# Altium PCB NFC Antenna PCB.PcbDoc
Units mil, origin at the board's own origin, x right, y up, seen from the top; angles counter-clockwise.
Board outline 2300 x 3995 mil, 2 copper layers (Top Layer, Bottom Layer); 48 components, 40 nets, 138 pads, 37 vias.
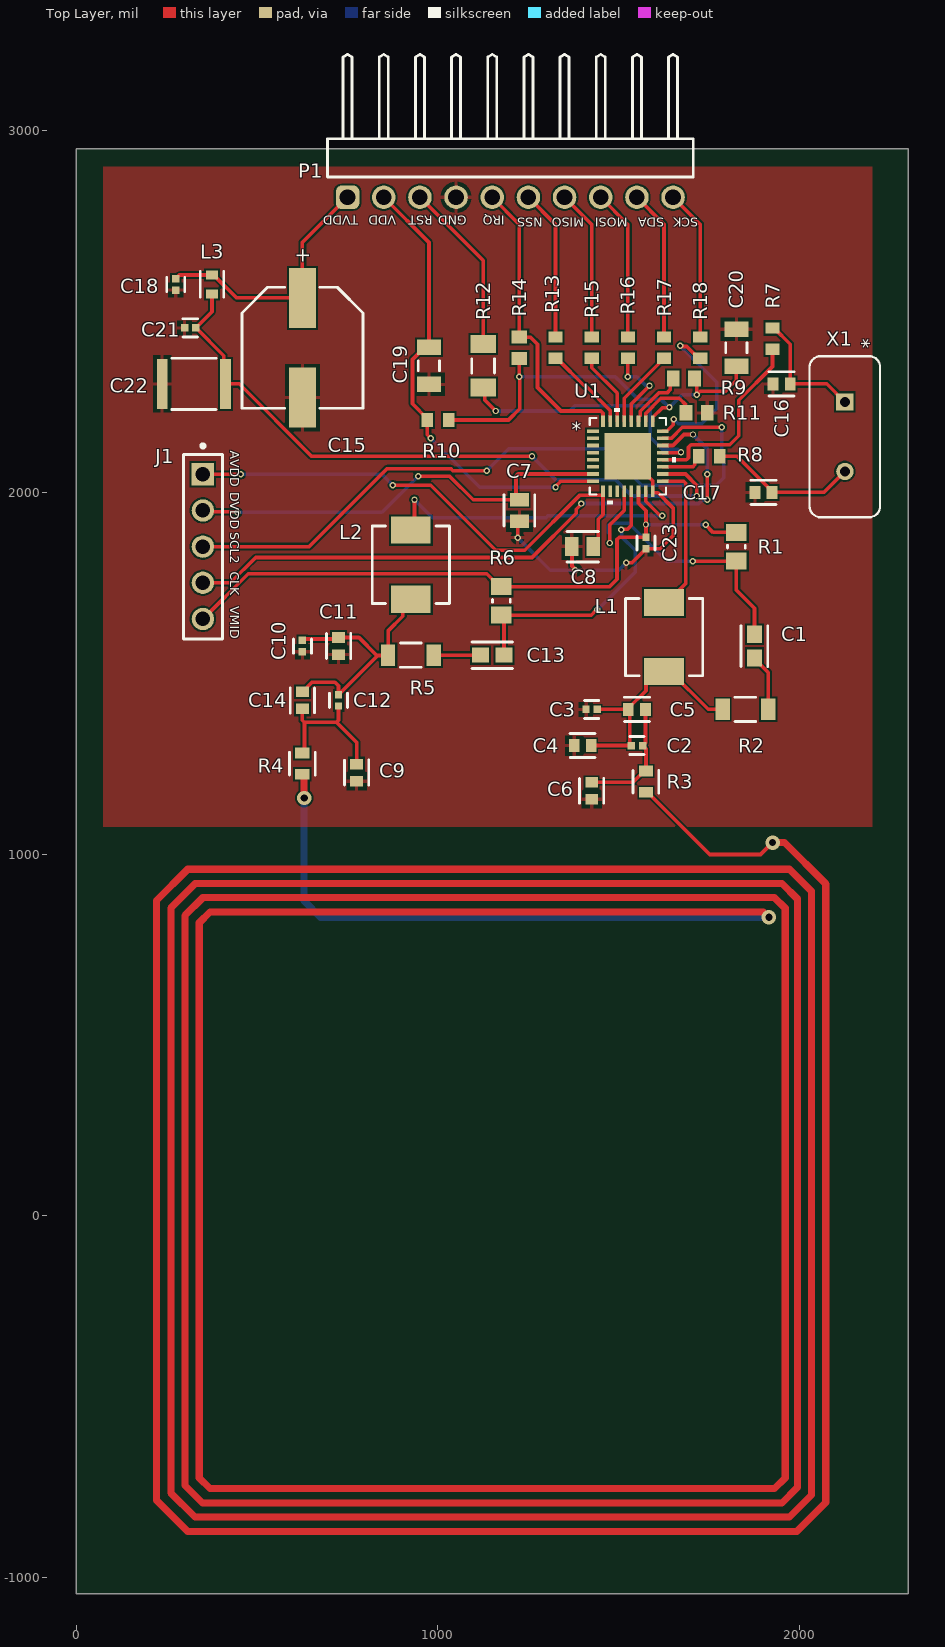
[diagram p0: Top Layer view]
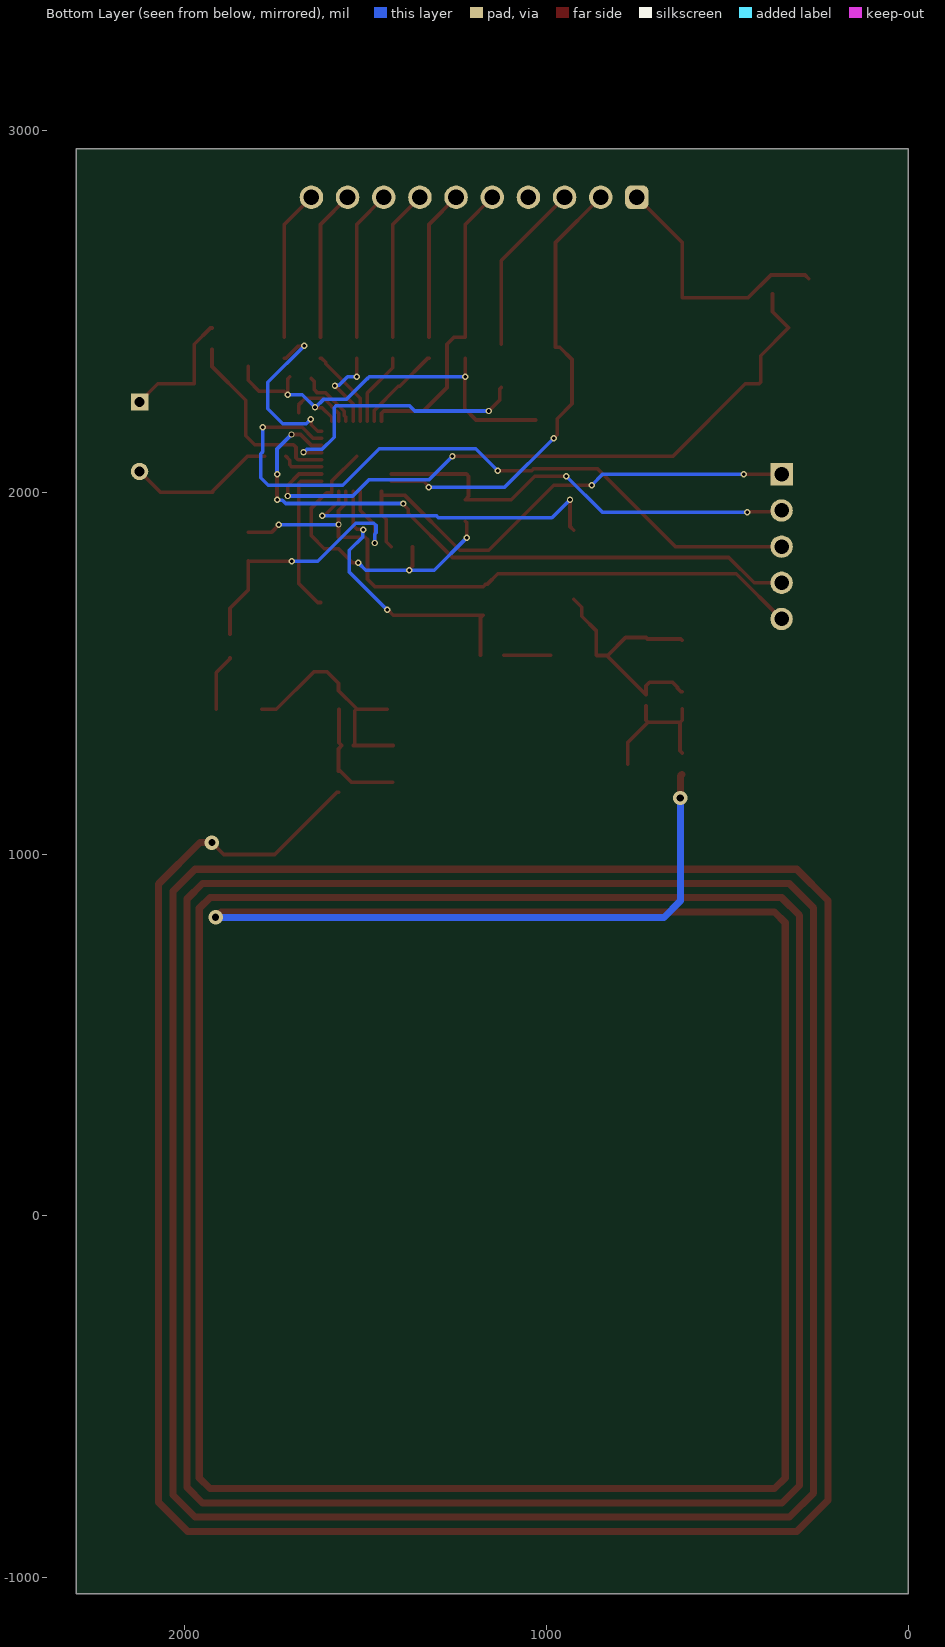
[diagram p1: Bottom Layer view, seen from below]
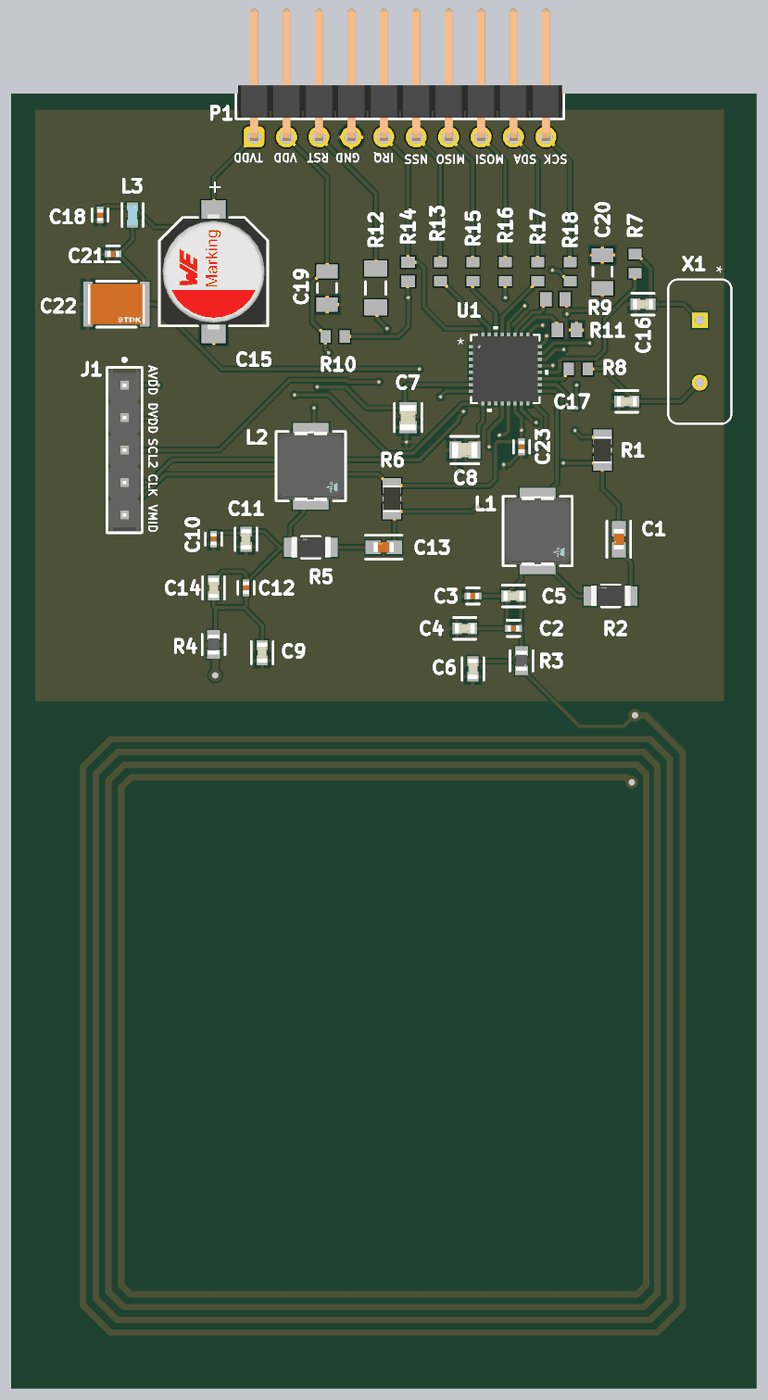
[diagram p2: 3D render of the assembled board from above, using the file's embedded part models]

## Layer stack, top to bottom
Top Solder: solder mask 0.4, Solder Resist, Dk 3.5
Top Layer: signal copper 1.4
Dielectric 1: dielectric 12.6, FR-4, Dk 4.8
Bottom Layer: signal copper 1.4
Bottom Solder: solder mask 0.4, Solder Resist, Dk 3.5

## Board outline
0,-1045 2300,-1045 2300,2950 0,2950

## Design rules (kind name [scope] priority, off if disabled: settings)
Clearance [All] p1: gap=5 ignorepadtopadclearanceinfootprint=FALSE except(0: SMDPad-Hole THPad-Hole Via-Hole Fill-Hole Poly-Hole Region-Hole Text-Hole)
HoleSize [All] p1: absolutevalues=TRUE maxlimit=248.03 minlimit=7.87 maxpercent=80.000 minpercent=20.000
HoleToHoleClearance [All] p1: gap=19.68 allowstackedmicrovias=TRUE
MinimumSolderMaskSliver [All] p1: minsoldermaskwidth=5
PolygonConnect [All] p1: connectstyle=Relief reliefconductorwidth=10 reliefentries=4 polygonreliefangle="90 Angle" airgapwidth=10
RoutingVias [All] p1: holewidth=9.84 width=17.72 viastyle="Through Hole" minholewidth=9.84 minwidth=17.72 maxholewidth=28 maxwidth=50
SilkToSilkClearance [All] p1: silktosilkclearance=5
SilkToSolderMaskClearance [IsPad] p1: minsilkscreentomaskgap=5 clearancetoexposedcopper=TRUE
SolderMaskExpansion [All] p1: expansion=4 istentingtop=FALSE
Width [All] p1: maxlimit=20 minlimit=5 preferedwidth=10 minimp=50.000000 maximp=50.000000 favimp=50.000000
25 further rules are at their usual default settings.

## Components (designator, comment, footprint, x,y, rotation, side; value= is the part's Value field where it differs from the comment)
C1 "06035C102KAT2A" FP-0603-L_1_6_0_15-W_0_81-IPC_A 1875,1575 r270 top
C2 "C0402C200J5GACTU" FP-C0402-BB-MFG 1550,1300 r0 top value="20 pF"
C3 "C0402C680J5GACTU" FP-C0402-BB-MFG 1425,1400 r180 top value="68 pF"
C4 "C0603C560J5GACTU" FP-C0603C-CF-MFG 1400,1300 r180 top value="56 pF"
C5 "C0603C510J5GACTU" FP-C0603C-CF-MFG 1550,1400 r0 top value="51 pF"
C6 "C0603C300J5GACTU" FP-C0603C-CF-MFG 1425,1175 r270 top value="30 pF"
C7 "C0805C474K5RACTU" FP-C0805C-DN-MFG 1225,1950 r270 top value="0.47 μF"
C8 "C0805C474K5RACTU" FP-C0805C-DN-MFG 1400,1850 r180 top value="0.47 μF"
C9 "C0603C300J5GACTU" FP-C0603C-CF-MFG 775,1225 r90 top value="30 pF"
C10 "C0402C680J5GACTU" FP-C0402-BB-MFG 625,1575 r90 top value="68 pF"
C11 "C0603C560J5GACTU" FP-C0603C-CF-MFG 725,1575 r90 top value="56 pF"
C12 "C0402C200J5GACTU" FP-C0402-BB-MFG 725,1425 r270 top value="20 pF"
C13 "06035C102KAT2A" FP-0603-L_1_6_0_15-W_0_81-IPC_A 1150,1550 r180 top
C14 "C0603C510J5GACTU" FP-C0603C-CF-MFG 625,1425 r270 top value="51 pF"
C15 "865060653010" WCAP-ASLL_D8H10.5 625,2400 r90 top
C16 "C0603C120J5GACTU" FP-C0603C-CF-MFG 1950,2300 r180 top value="12 pF"
C17 "C0603C120J5GACTU" FP-C0603C-CF-MFG 1900,2000 r180 top value="12 pF"
C18 "C0402C104K8PACTU" FP-C0402-BB-MFG 275,2575 r90 top value="0.10 μF"
C19 "C1206C105K5RACTU" CAPC3216X110X50LL20T25 975,2350 r90 top
C20 "C1206C105K5RACTU" CAPC3216X110X50LL20T25 1825,2400 r270 top
C21 "C0402C104K8PACTU" FP-C0402-BB-MFG 315,2455 r0 top value="0.10 μF"
C22 "C4532X7R1H685K250KB" FP-C4532-250-0_4-IPC_C 325,2300 r0 top
C23 "C0402C104K8PACTU" FP-C0402-BB-MFG 1575,1860 r270 top value="0.10 μF"
J1 "22-28-4050" FP-22-28-4050-MFG 350,1850 r270 top
L1 "IHLP2020CZERR47M01" FP-IHLP-2020CZ-FP_1_905x2-MFG 1625,1600 r270 top
L2 "IHLP2020CZERR47M01" FP-IHLP-2020CZ-FP_1_905x2-MFG 925,1800 r270 top
L3 "LQW18AN22NG00D" FP-LQW18AN_00-MFG 375,2575 r90 top
P1 "61301011021" 61301011021 1200,2925 r180 top
R1 "RC0805FR-071KL" RESC2013X60X35ML10T20 1825,1850 r90 top
R2 "RT1206BRD0712KL" FP-RT1206-MFG 1850,1400 r180 top value=12KΩ
R3 "CRCW060315R0FKEA" FP-CRCW0603-e3-MFG 1575,1200 r270 top
R4 "CRCW060315R0FKEA" FP-CRCW0603-e3-MFG 625,1250 r270 top
R5 "RT1206BRD0712KL" FP-RT1206-MFG 925,1550 r180 top value=12KΩ
R6 "RC0805FR-071KL" RESC2013X60X35ML10T20 1175,1700 r90 top
R7 "RC0603JR-070RL" RESC1608X55X25ML10T15 1925,2425 r90 top
R8 "RC0603JR-070RL" RESC1608X55X25ML10T15 1750,2100 r0 top
R9 "RK73B1JTTD472J" RESC1608X55X30ML20T10 1680,2315 r0 top
R10 "RC0603JR-070RL" RESC1608X55X25ML10T15 1000,2200 r0 top
R11 "RK73B1JTTD472J" RESC1608X55X30ML20T10 1715,2220 r180 top
R12 "RC1206FR-071KL" RESC3116X65X40ML10T20 1125,2350 r90 top
R13 "RC0603JR-070RL" RESC1608X55X25ML10T15 1325,2400 r90 top
R14 "RK73B1JTTD472J" RESC1608X55X30ML20T10 1225,2400 r90 top
R15 "RC0603JR-070RL" RESC1608X55X25ML10T15 1425,2400 r90 top
R16 "RC0603JR-070RL" RESC1608X55X25ML10T15 1525,2400 r90 top
R17 "RC0603JR-070RL" RESC1608X55X25ML10T15 1625,2400 r90 top
R18 "RC0603JR-070RL" RESC1608X55X25ML10T15 1725,2400 r90 top
U1 "CLRC66302HN,118" HVQFN32_SOT617-1_NXP 1525,2100 r0 top
X1 "LFXTAL036075BULK" XTAL_LFXTAL0360_IQD 2125,2250 r270 top

## Footprints (in the part's own frame and the unit in brackets; to place one, negate y for a bottom-side part, rotate by r counter-clockwise, add the part's x,y. Pads: shape width x height; smd on the part's side, far side on the other; paste and mask are expansions set on the pad)
61301011021 [mm] "Pin Header, pitch 2.54 mm, THT, Angled, single row, 10p"
  rrect50% 1.65x1.65 hole 1.1: 1(11.43,2.77)
  round 1.65 hole 1.1: 2(8.89,2.77) 3(6.35,2.77) 4(3.81,2.77) 5(1.27,2.77) 6(-1.27,2.77) 7(-3.81,2.77) 8(-6.35,2.77) 9(-8.89,2.77) 10(-11.43,2.77)
  silkscreen extent -12.85,-7.27 12.85,1.35, body extent -12.7,-7.27 12.7,3.09, height 2.58
CAPC3216X110X50LL20T25 [mm] "Chip Capacitor, 2-Leads, Body 3.20x1.60mm, IPC High Density"
  rect 1.1x1.7 smd: 1(-1.3,0) 2(1.3,0)
  silkscreen extent -0.35,-0.75 0.35,0.75, body extent -1.7,-0.9 1.7,0.9, height 1.1
FP-22-28-4050-MFG [mm]
  rect 1.57x1.57 hole 1.02 paste-2539.97 mask+0: 1(-5.08,0)
  round 1.57 hole 1.02 paste-2539.97 mask+0: 2(-2.54,0) 3(0,0) 4(2.54,0) 5(5.08,0)
  silkscreen extent -7.2,-1.37 6.48,1.37, body extent -6.58,-1.47 6.58,1.47, height 0.25
FP-0603-L_1_6_0_15-W_0_81-IPC_A [mil]
  rect 47.5x42.06 smd paste+0 mask+0: 1(-32.51,0) 2(32.51,0)
  silkscreen extent -56,-37 56,37, body extent -76,-41 76,41, height 10
FP-C0402-BB-MFG [mm]
  rect 0.52x0.52 smd paste+0 mask+0: 1(-0.4,0) 2(0.4,0)
  silkscreen extent -0.5,-0.64 0.5,0.64, body extent -0.8,-0.4 0.8,0.4, height 0.25
FP-C0603C-CF-MFG [mm]
  rect 0.75x0.9 smd paste+0 mask+0: 1(-0.6,0) 2(0.6,0)
  silkscreen extent -0.87,-0.85 0.88,0.85, body extent -1.2,-0.6 1.2,0.6, height 0.25
FP-C0805C-DN-MFG [mm]
  rect 0.95x1.35 smd paste+0 mask+0: 1(-0.75,0) 2(0.75,0)
  silkscreen extent -1.1,-1.07 1.1,1.07, body extent -1.4,-0.85 1.4,0.85, height 0.25
FP-C4532-250-0_4-IPC_C [mm]
  rect 0.753x3.503 smd paste+0 mask+0: 1(-2.225,0) 2(2.225,0)
  silkscreen extent -1.55,-1.8 1.55,1.8, body extent -2.7,-1.9 2.7,1.9, height 0.25
FP-CRCW0603-e3-MFG [mm]
  rect 0.75x1 smd paste+0 mask+0: 1(-0.75,0) 2(0.75,0)
  silkscreen extent -0.8,-0.9 0.8,0.9, body extent -1.22,-0.6 1.22,0.6, height 0.25
FP-IHLP-2020CZ-FP_1_905x2-MFG [mm]
  rect 1.905x2.79 smd paste+0 mask+0: 1(-2.425,0) 2(2.425,0)
  silkscreen extent -2.72,-2.72 2.72,2.72, body extent -3.48,-2.82 3.48,2.82, height 0.25
FP-LQW18AN_00-MFG [mm]
  rect 0.625x0.85 smd paste+0 mask+0: 1(-0.663,0) 2(0.663,0)
  silkscreen extent -0.9,-0.82 0.9,0.82, body extent -1.07,-0.6 1.07,0.6, height 0.25
FP-RT1206-MFG [mm]
  rect 1x1.5 smd paste+0 mask+0: 1(-1.6,0) 2(1.6,0)
  silkscreen extent -0.72,-0.85 0.72,0.85, body extent -2.2,-0.95 2.2,0.95, height 0.25
HVQFN32_SOT617-1_NXP [mil]
  rect 32x10 smd paste+0 mask+0: 1(-96.5,68.9) 2(-96.5,49.21) 3(-96.5,29.53) 4(-96.5,9.84) 5(-96.5,-9.84) 6(-96.5,-29.53) 7(-96.5,-49.21) 8(-96.5,-68.9) 17(96.5,-68.9) 18(96.5,-49.21) 19(96.5,-29.53) 20(96.5,-9.84) 21(96.5,9.84) 22(96.5,29.53) 23(96.5,49.21) 24(96.5,68.9)
  rect 10x32 smd paste+0 mask+0: 9(-68.9,-96.5) 10(-49.21,-96.5) 11(-29.53,-96.5) 12(-9.84,-96.5) 13(9.84,-96.5) 14(29.53,-96.5) 15(49.21,-96.5) 16(68.9,-96.5) 25(68.9,96.5) 26(49.21,96.5) 27(29.53,96.5) 28(9.84,96.5) 29(-9.84,96.5) 30(-29.53,96.5) 31(-49.21,96.5) 32(-68.9,96.5)
  rect 128x128 smd paste-63.5 mask+0: 33(0,0)
  silkscreen extent -106,-132 132,132, body extent -101,-101 101,101, height 39
RESC1608X55X25ML10T15 [mm] "Chip Resistor, 2-Leads, Body 1.60x0.80mm, IPC Low Density"
  rect 0.8x1 smd: 1(-0.75,0) 2(0.75,0)
  body extent -0.85,-0.45 0.85,0.45, height 0.55
RESC1608X55X30ML20T10 [mm] "Chip Resistor, 2-Leads, Body 1.60x0.80mm, IPC Low Density"
  rect 0.9x1.1 smd: 1(-0.75,0) 2(0.75,0)
  body extent -0.9,-0.5 0.9,0.5, height 0.55
RESC2013X60X35ML10T20 [mm] "Chip Resistor, 2-Leads, Body 2.1x1.35mm, IPC Low Density"
  rect 1.2x1.45 smd: 1(-1,0) 2(1,0)
  silkscreen extent -0.1,-0.63 0.1,0.63, body extent -1.05,-0.68 1.05,0.67, height 0.6
RESC3116X65X40ML10T20 [mm] "Chip Resistor, 2-Leads, Body 3.10x1.60mm, IPC Low Density"
  rect 1.25x1.8 smd: 1(-1.525,0) 2(1.525,0)
  silkscreen extent -0.5,-0.8 0.5,0.8, body extent -1.6,-0.85 1.6,0.85, height 0.65
WCAP-ASLL_D8H10.5 [mm] "Aluminium Electrolytic V-Chip SMT Capacitors, 8x10.5mm"
  rect 4.2x1.9 smd: 1(3.5,0) 2(-3.5,0)
  silkscreen extent -4.25,-4.25 4.25,4.25, body extent -4.5,-4.15 4.5,4.15, height 10.5
XTAL_LFXTAL0360_IQD [mil]
  rect 48x48 / inner round 60 / far side rect 48x48 hole 28 paste-99999 mask+0: 1(0,0)
  round 48 / inner round 60 / far side round 48 hole 28 paste-99999 mask+0: 2(192.13,0)
  silkscreen extent -126,-98 319,98

## Part data
C1 C13: library part CMP-2006-04378-2, "General Purpose Ceramic Capacitor, 0603, 1nF, 10%, X7R, 15%, 50V", Capacitance=1nF, Case Code (Imperial)=0603, Case Code (Metric)=1608, Dielectric=X7R, Dielectric Material=Ceramic, Max Operating Temperature=125°C, Min Operating Temperature=-55°C, Package Quantity=4000, Tolerance=10%, Voltage=50V, Case/Package=0603, Construction=Flat, Contact Plating=Tin, Depth=0.81mm, Height=0.9mm, Lead Free="Lead Free", Length=1.6mm, Mount="Surface Mount", Number of Pins=2, Packaging="Tape and Reel", Radiation Hardening=No, REACH SVHC="No SVHC", RoHS Compliant=Yes, Series=-, Termination=SMD/SMT, Thickness=0.035inch, Voltage Rating=50V, Voltage Rating (DC)=50V, Weight=7.1E-05oz, Width=0.032inch
C2 C12: library part CMP-1034-00890-3, "CAP CER 20PF 50V 5% NP0 0402", Capacitance="20 pF", Manufacturer=Kemet, Package=C0402-BB, Temperature="-55°C to +125°C", Temperature Characteristic=C0G, Temperature Coefficient=15%, Temperature Range High=+125°C, Temperature Range Low=-55°C, Tolerance=0.05, Voltage Rating="50 V", Automotive=No, Category=Cap, ComponentLink2Description=Datasheet, ComponentLink2URL=https://content.kemet.com/datasheets/KEM_C1002_X7R_SMD.pdf, Device Class L1="Passive Components", Device Class L2=Capacitors, Device Class L3="Ceramic Capacitors", Digikey Description="CAP CER 20PF 50V 5% NP0 0402", Height=0.55mm, Ipc Land Pattern Name=CAPC10050X50, Lead Free=Yes, Manufacturer Part Number=C0402C200J5GACTU, Material=Ceramic, Mouser Description="Multilayer Ceramic Capacitors MLCC - SMD/SMT 50volts 20pF C0G 5%", Octopart=https://octopart.com/c0402c200j5gactu-kemet-9143900, RoHS=TRUE
C3 C10: library part CMP-1034-01170-4, "CAP CER 68PF 50V 5% NP0 0402", Capacitance="68 pF", Manufacturer=Kemet, Package=C0402-BB, Temperature="-55°C to +125°C", Temperature Characteristic=C0G, Temperature Coefficient=15%, Temperature Range High=+125°C, Temperature Range Low=-55°C, Tolerance=0.05, Voltage Rating="50 V", Automotive=No, Category=Cap, ComponentLink2Description=Datasheet, ComponentLink2URL=https://content.kemet.com/datasheets/KEM_C1002_X7R_SMD.pdf, Device Class L1="Passive Components", Device Class L2=Capacitors, Device Class L3="Ceramic Capacitors", Digikey Description="CAP CER 68PF 50V 5% NP0 0402", Height=0.55mm, Ipc Land Pattern Name=CAPC10050X50, Lead Free=Yes, Manufacturer Part Number=C0402C680J5GACTU, Material=Ceramic, Mouser Description="Multilayer Ceramic Capacitors MLCC - SMD/SMT 50volts 68pF C0G 5%", Octopart=https://octopart.com/c0402c680j5gactu-kemet-127205, RoHS=TRUE
C4 C11: library part CMP-1035-01122-3, "CAP CER 56PF 50V C0G/NP0 0603", Capacitance="56 pF", Manufacturer=KEMET, Package=C0603C-CF, Temperature="-55°C to +125°C", Temperature Characteristic=C0G, Temperature Coefficient=30ppm/°C, Temperature Range High=+125°C, Temperature Range Low=-55°C, Tolerance=0.05, Voltage Rating="50 V", Automotive=Yes, Automotive Grade="Grade 1", Category=Cap, ComponentLink2Description=Datasheet, ComponentLink2URL=https://api.kemet.com/component-edge/download/datasheet/C0603C100J5GACAUTO.pdf, Device Class L1="Passive Components", Device Class L2=Capacitors, Device Class L3="Ceramic Capacitors", Digikey Description="CAP CER 56PF 50V C0G/NP0 0603", Height=0.87mm, Lead Free=Yes, Manufacturer Part Number=C0603C560J5GACTU, Material=Ceramic, Mouser Description="Cap Ceramic 56pF 50V C0G 5% SMD 0603 125°C Paper T/R", Octopart=https://octopart.com/c0603c560j5gactu-kemet-107933, RoHS=TRUE
C5 C14: library part CMP-1035-01095-3, "CAP CER 51PF 50V 5% NP0 0603", Capacitance="51 pF", Manufacturer=KEMET, Package=C0603C-CF, Temperature="-55°C to +125°C", Temperature Characteristic=C0G, Temperature Coefficient=30ppm/°C, Temperature Range High=+125°C, Temperature Range Low=-55°C, Tolerance=0.05, Voltage Rating="50 V", Automotive=Yes, Automotive Grade="Grade 1", Category=Cap, ComponentLink2Description=Datasheet, ComponentLink2URL=https://api.kemet.com/component-edge/download/datasheet/C0603C100J5GACAUTO.pdf, Device Class L1="Passive Components", Device Class L2=Capacitors, Device Class L3="Ceramic Capacitors", Digikey Description="CAP CER 51PF 50V 5% NP0 0603", Height=0.87mm, Lead Free=Yes, Manufacturer Part Number=C0603C510J5GACTU, Material=Ceramic, Mouser Description="Multilayer Ceramic Capacitors MLCC - SMD/SMT 50volts 51pF C0G 5%", Octopart=https://octopart.com/c0603c510j5gactu-kemet-9143750, RoHS=TRUE
C6 C9: library part CMP-1035-00914-3, "CAP CER 30PF 50V 5% NP0 0603", Capacitance="30 pF", Manufacturer=KEMET, Package=C0603C-CF, Temperature="-55°C to +125°C", Temperature Characteristic=C0G, Temperature Coefficient=30ppm/°C, Temperature Range High=+125°C, Temperature Range Low=-55°C, Tolerance=0.05, Voltage Rating="50 V", Automotive=Yes, Automotive Grade="Grade 1", Category=Cap, ComponentLink2Description=Datasheet, ComponentLink2URL=https://api.kemet.com/component-edge/download/datasheet/C0603C100J5GACAUTO.pdf, Device Class L1="Passive Components", Device Class L2=Capacitors, Device Class L3="Ceramic Capacitors", Digikey Description="CAP CER 30PF 50V 5% NP0 0603", Height=0.87mm, Lead Free=Yes, Manufacturer Part Number=C0603C300J5GACTU, Material=Ceramic, Mouser Description="Multilayer Ceramic Capacitors MLCC - SMD/SMT 50volts 30pF C0G 5%", Octopart=https://octopart.com/c0603c300j5gactu-kemet-199455, RoHS=TRUE
C7 C8: library part CMP-2007-03659-2, "CAP CER 0.47UF 50V 10% X7R 0805", Capacitance="0.47 μF", Manufacturer=KEMET, Package=C0805C-DN, Temperature="-55°C to +125°C", Temperature Characteristic=X7R, Temperature Coefficient=30ppm/°C, Temperature Range High=+125°C, Temperature Range Low=-55°C, Tolerance=0.1, Voltage Rating="50 V", Automotive=No, Category=Cap, ComponentLink2Description=Datasheet, ComponentLink2URL=https://content.kemet.com/datasheets/KEM_C1003_C0G_SMD.pdf, Device Class L1="Passive Components", Device Class L2=Capacitors, Device Class L3="Ceramic Capacitors", Digikey Description="CAP CER 0.47UF 50V 10% X7R 0805", Height=0.88mm, Ipc Land Pattern Name=CAPC200125X78, Lead Free=Yes, Manufacturer Part Number=C0805C474K5RACTU, Material=Ceramic, Mouser Description="0805 C 470nF Ceramic Multilayer Capacitor, 50 VDC, +125degC, X7R Dielec, +/-10%", Octopart=https://octopart.com/c0805c474k5ractu-kemet-144543, RoHS=TRUE
C15: library part CMP-03913-54202488-1, "865060653010 Aluminum Electrolytic Capacitor, Polarized, Aluminum (wet), 50V, 20% +Tol, 20% -Tol, 100uF, Surface Mount, 3333", Capacitance=100µF, Case/Package=Radial, ESR (Equivalent Series Resistance)=227.529mΩ, Insulation Resistance=1MΩ, Leakage Current=50µA, Max Operating Temperature=105°C, Min Operating Temperature=-55°C, Ripple Current=350mA, Tolerance=20%, Voltage Rating=50V, Diameter=8mm, Height=10.5mm, Height - Seated (Max)=10.4902mm, Impedance=340mΩ, Length=10.5mm, Life (Hours)=5000hours, Mount="Surface Mount", NexarPartId=54202488, Packaging="Tape & Reel (TR)", Polarity=Polar, REACH SVHC=Unknown, Ripple Current (AC)=350mA, RoHS=Compliant, Voltage Rating (DC)=50V
C16 C17: library part CMP-2006-03703-3, "Ceramic Capacitor 12Pf 50V, C0G, 5%, 0603, Full Reel", Capacitance="12 pF", Manufacturer=KEMET, Package=C0603C-CF, Temperature="-55°C to +125°C", Temperature Characteristic=C0G, Temperature Coefficient=30ppm/°C, Temperature Range High=+125°C, Temperature Range Low=-55°C, Tolerance=0.05, Voltage Rating="50 V", Automotive=Yes, Automotive Grade="Grade 1", Category=Cap, ComponentLink2Description=Datasheet, ComponentLink2URL=https://api.kemet.com/component-edge/download/datasheet/C0603C100J5GACAUTO.pdf, Device Class L1="Passive Components", Device Class L2=Capacitors, Device Class L3="Ceramic Capacitors", Digikey Description="Ceramic Capacitor 12Pf 50V, C0G, 5%, 0603, Full Reel", Height=0.87mm, Lead Free=Yes, Manufacturer Part Number=C0603C120J5GACTU, Material=Ceramic, Mouser Description="Ceramic Capacitor 12Pf 50V, C0G, 5%, 0603, Full Reel", Octopart=https://octopart.com/c0603c120j5gactu-kemet-108780, RoHS=TRUE
C18 C21 C23: library part CMP-2008-02046-2, "CAP CER 0.1UF 10V X5R 0402", Capacitance="0.10 μF", Manufacturer=Kemet, Package=C0402-BB, Temperature="-55°C to +125°C", Temperature Characteristic=X5R, Temperature Coefficient=15%, Temperature Range High=+125°C, Temperature Range Low=-55°C, Tolerance=0.1, Voltage Rating="10 V", Automotive=No, Category=Cap, ComponentLink2Description=Datasheet, ComponentLink2URL=https://content.kemet.com/datasheets/KEM_C1002_X7R_SMD.pdf, Device Class L1="Passive Components", Device Class L2=Capacitors, Device Class L3="Ceramic Capacitors", Digikey Description="CAP CER 0.1UF 10V X5R 0402", Height=0.55mm, Ipc Land Pattern Name=CAPC10050X50, Lead Free=Yes, Manufacturer Part Number=C0402C104K8PACTU, Material=Ceramic, Mouser Description="Capacitor 100 nF 10 VDC 0402", Octopart=https://octopart.com/c0402c104k8pactu-kemet-140039, RoHS=TRUE
C19 C20: library part CMP-2000-06011-1, "Chip Capacitor, 1 uF, +/- 10%, 50 V, -55 to 125 degC, 1206 (3216 Metric), RoHS, Tape and Reel", Capacitance=1uF, Capacitance - nF=1000nF, Case Code - in=1206, Case Code - mm=3216, Case Height=1mm, Case Length=3.2mm, Case Width=1.6mm, Dielectric=X7R, Manufacturer=Kemet, Maximum Operating Temperature=+125C, Minimum Operating Temperature=-55C, Operating Temperature Range=-55Cto+125C, Package / Case=1206(3216metric), Package Description="2-Pin Surface Mount Device, Body 3.2 x 1.6 mm", Temperature Coefficient / Code=+/-15%, Tolerance=10%, Voltage Rating=50V, Brand=Kemet, Class=Class1, Datasheet URL=http://www.kemet.com/docfinder?Partnumber=C1206C105K5RACTU, Datasheet Version=02/2016, Dimensions=1.6mmWx3.2mmLx1mmH, Factory Pack Quantity=2500, Manufacturer URL=http://www.kemet.com/, Mounting Technology=SurfaceMount, Package Reference=1206, Packaging=Reel, Product=GeneralTypeMLCCs, Product Category=MultilayerCeramicCapacitorsMLCC-SMD/SMT, RoHS=Details, Series=C1206C, Termination Style=SMD/SMT, Type=SMDMLCCX7R6.3-250VDCCommericalGrade, Voltage Rating DC=50V
C22: library part CMP-08246-005467-1, "Multilayer Ceramic Capacitors 6.8uF ±10% 50V X7R SMD 1812", Capacitance=6.8uF, Case Code (Imperial)=1812, Case Code (Metric)=4532, Dielectric=X7R, Dielectric Material=Ceramic, Max Operating Temperature=125°C, Min Operating Temperature=-55°C, Package Quantity=1, Tolerance=10%, Voltage=50V, Case/Package=1812, Construction=Flat, Depth=3.2mm, Height=2.5mm, Lead Free="Lead Free", Length=4.5mm, Mount="Surface Mount", Number of Pins=2, Packaging="Tape and Reel", Radiation Hardening=No, REACH SVHC="No SVHC", Resistor Type=Ceramic, RoHS Compliant=Yes, Series=C, Termination=SMD/SMT, Thickness=0.11inch, Voltage Rating=50V, Voltage Rating (DC)=50V, Weight=0.000952oz, Width=0.126inch
J1: library part CMP-00257-00278173-1, "22-28-4050 KK® 254 Breakaway Header, Vertical, 5 Circuits, Tin (Sn) Plating, Mating Pin Length 6.09mm", Color=Black, Contact Resistance=20mΩ, Current Rating=4A, Flammability Rating="UL94 V-0", Max Operating Temperature=75°C, Max Voltage Rating (DC)=250.25kV, Min Operating Temperature=0°C, Voltage Rating=250V, Connector Type="Male Pin", Contact Material=Brass, Contact Mating Length=6.096mm, Contact Plating=Tin, Gender=Male, Glow Wire Compliant=Non-compliant, Height=2.29mm, Housing Color=Black, Housing Material=Thermoplastic, Lead Free="Lead Free", Lead Pitch=2.54mm, Length=12.7mm, Mount="Through Hole", NexarPartId=278173, Number of Circuits=5, Number of Contacts=5, Number of Positions=5, Number of Rows=1, Orientation=Vertical, Packaging=Bulk, Pitch=2.54mm, Radiation Hardening=No, REACH SVHC=Unknown, RoHS=Compliant, Schedule B=8536694040, Termination=Solder, Voltage Rating (DC)=250V, Width=2.49mm
L1 L2: library part CMP-02424-000036-1, "Fixed Inductors Commercial High Saturation Series 0.47uH 12.2A 7.04mΩ 20%", Case/Package=2020, Current Rating=12.2A, DC Resistance (DCR)=7.04mR, Inductance=470nH, Max DC Current=16A, Max Operating Temperature=125°C, Min Operating Temperature=-55°C, Package Quantity=2000, Self Resonant Frequency=5MHz, Test Frequency=100kHz, Tolerance=20%, Core Material=Metal, Depth=5.43mm, Height=3mm, Height - Seated (Max)=0.118inch, Lead Free="Lead Free", Length=5.49mm, Military Standard=Not, Mount="Surface Mount", Packaging="Tape and Reel", Radiation Hardening=No, Saturation Current=16A, Shielding=Shielded, Termination=SMD/SMT, Width=5.18mm
L3: library part CMP-06042-008865-1, "Wire Wound RF Inductor 22nH ±2% 500mA 0.17Ω 0603 (1608)", Case Code (Imperial)=0603, Case Code (Metric)=1608, Current=400mA, Current Rating=500mA, DC Resistance (DCR)=170mR, Inductance=22nH, Inductance Tolerance=2%, Max Operating Temperature=125°C, Min Operating Temperature=-55°C, Package Quantity=4000, Resistor Type=Wirewound, Self Resonant Frequency=4.6GHz, Test Frequency=100MHz, Case/Package=0603, Core Material=Non-Magnetic, DC Current=500mA, Depth=1mm, Height=0.8mm, Height - Seated (Max)=0.039inch, Lead Free="Lead Free", Length=1.6mm, Max DC Current=500mA, Military Standard=Not, Mount="Surface Mount", Number of Pins=2, Packaging="Tape and Reel", Q Factor=40, REACH SVHC="No SVHC", Series Resistance=170mR, Shielding=Unshielded, Termination=SMD/SMT, Tolerance=2%, Weight=0.000106oz, Width=0.8mm
P1: library part CMP-1502-01081-2, Color=Black, Contact Resistance=20mΩ, Current Rating=3A, Flammability Rating="UL94 V-0", Insulation Resistance=1GΩ, Max Operating Temperature=125°C, Min Operating Temperature=-40°C, Operating Supply Voltage=250V, Connector Type="Male Pin", Contact Gender=Male, Contact Material=Copper, Contact Mating Length=5.9944mm, Contact Plating=Gold, Gender=Male, Height=2.54mm, Housing Material=PBT, Insulation=Insulated, Lead Pitch=2.54mm, Length=25.4mm, Mount="Through Hole", NexarPartId=18818158, Number of Contacts=10, Number of Pins=10, Number of Positions=10, Number of Rows=1, Orientation="Right Angle", Packaging=Bulk, Pitch=2.54mm, REACH SVHC=Unknown, RoHS=Compliant, Termination="Through Hole", Voltage Rating=250V, Width=25.4mm
R1 R6: library part CMP-2100-03671-1, "Chip Resistor, 1 KOhm, +/- 1%, 125 mW, -55 to 155 degC, 0805 (2012 Metric), RoHS, Tape and Reel", Case Code (Imperial)=0805, Case Code (Metric)=2012, Manufacturer=Yageo, Max Operating Temperature=155degC, Max Power Dissipation=125mW, Min Operating Temperature=-55degC, Package Description="2-Pin Surface Mounted Device, Body 2 x 1.25 mm", Package Quantity=1, Resistance=1KOhm, Temperature Coefficient=100ppm/degreesC, Tolerance=1%, Voltage Rating=150V, Case/Package=0805, Composition=ThickFilm, Datasheet URL=http://www.yageo.com/NewPortal/yageodocoutput?fileName=/pdf/R-Chip/PYu-RC_Group_51_RoHS_L_5.pdf, Datasheet Version="Rev. 5, 10/2016", Depth=1.25mm, Height=0.024inch, Lead Free=LeadFree, Length=0.079inch, Manufacturer URL=http://www.yageo.com/, Military Standard=Not, Number of Pins=2, Number of Terminations=2, Package Reference=0805, Packaging=TapeandReel, Power Rating=125mW, REACH SVHC=Unknown, RoHSCompliant=true, Termination=SMD/SMT, Voltage Rating (DC)=150V, Width=0.049inch
R2 R5: library part CMP-2003-04278-2, "RES SMD 12K OHM 0.1% 1/4W 1206", Manufacturer=Yageo, Package=RT1206, Power Rating=0.25W, Resistance=12KΩ, Temperature="-55°C to +155°C", Temperature Coefficient="25 ppm/°C", Temperature Range High=+155°C, Temperature Range Low=-55°C, Tolerance=0.005, Voltage Rating=200V, Automotive=No, Category=Res, ComponentLink2Description=Datasheet, ComponentLink2URL=http://www.yageo.com/documents/recent/PYu-RT_1-to-0.01_RoHS_L_9.pdf, Composition="Thin Film", Device Class L1="Passive Components", Device Class L2=Resistors, Device Class L3="Chip SMD Resistors", Digikey Description="RES SMD 12K OHM 0.1% 1/4W 1206", Footprint Url=http://www.yageo.com/exep/pages/download/literatures/PYu-R_Mount_10.pdf, Height=0.65mm, Ipc Land Pattern Name=RESC310160X55, Lead Free=Yes, Manufacturer Part Number=RT1206BRD0712KL, Mouser Description="Thin Film Resistors 1/4W 12K ohm .1% 25ppm", Octopart=https://octopart.com/rt1206brd0712kl-yageo-1232840, RoHS=TRUE, Series=RT
R3 R4: library part CMP-2000-02926-2, "RES Thick Film, 15Ω, 1%, 0.1W, 100ppm/°C, 0603", Case Code (Imperial)=0603, Case Code (Metric)=1608, Max Operating Temperature=155°C, Max Power Dissipation=100mW, Min Operating Temperature=-55°C, Package Quantity=10, Resistance=15R, Temperature Coefficient=100ppm/°C, Tolerance=1%, Voltage Rating=75V, Case/Package=0603, Composition="Thick Film", Contact Plating=Tin, Depth=0.85mm, Features="Automotive AEC-Q200", Height=0.45mm, Lead Free="Lead Free", Length=1.55mm, Military Standard=Not, Mount="Surface Mount", Number of Terminations=2, Packaging="Tape and Reel", Power Rating=100mW, Radiation Hardening=No, Termination=SMD/SMT, Voltage Rating (DC)=75V, Weight=7.1E-05oz, Width=0.033inch
R7 R8 R10 R13 R15 R16 R17 R18: library part CMP-2100-03667-1, "Chip Resistor, 0 Ohm, +/- 5%, 0.1 W, -55 to 155 degC, 0603 (1608 Metric), RoHS, Tape and Reel", Case Code (Imperial)=0603, Case Code (Metric)=1608, Manufacturer=Yageo, Max Operating Temperature=155degC, Min Operating Temperature=-55degC, Package Description="2-Pin Surface Mount Device, Body 1.6 x 0.8 mm", Package Quantity=5000, Power Rating=100mW, Resistance="0 ohm", Temperature Coefficient=200ppm/degreesC, Tolerance=5%, Voltage Rating=50V, Case/Package=0603, Composition=ThickFilm, Contact Plating=Tin, Datasheet URL=http://www.yageo.com/NewPortal/yageodocoutput?fileName=/pdf/R-Chip/PYu-RC_Group_51_RoHS_L_5.pdf, Datasheet Version="Rev. 5, 10/2016", Depth=0.8mm, Height=0.45mm, Lead Free=LeadFree, Length=1.6mm, Manufacturer URL=http://www.yageo.com/, Military Standard=Not, Number of Pins=2, Package Reference=0603, Packaging=TapeandReel, Radiation Hardening=No, REACH SVHC=NoSVHC, RoHSCompliant=true, Termination=SMD/SMT, Voltage Rating (DC)=50V, Width=0.8mm
R9 R11 R14: library part CMP-2000-00993-1, Manufacturer="KOA Speer", Resistance=4.7k, Part Number=RK73B1JTTD472J
R12: library part CMP-2100-03678-1, "Chip Resistor, 1 KOhm, +/- 1%, 0.25 W, -55 to 155 degC, 1206 (3216 Metric), RoHS, Tape and Reel", Case Code (Imperial)=1206, Case Code (Metric)=3216, Manufacturer=Yageo, Max Operating Temperature=155degC, Min Operating Temperature=-55degC, Package Description="2-Pin Surface Mount Device, Body 3.1 x 1.6 mm", Package Reference=1206.0, Power Rating=250mW, Resistance=1KOhm, Temperature Coefficient=100ppm/degreesC, Tolerance=1%, Voltage Rating=200V, Case/Package=1206, Composition=ThickFilm, Datasheet URL=http://www.yageo.com/NewPortal/yageodocoutput?fileName=/pdf/R-Chip/PYu-RC_Group_51_RoHS_L_5.pdf, Datasheet Version="Rev. 5, 10/2016", Depth=1.6mm, Height=0.55mm, Lead Free=LeadFree, Length=3.1mm, Manufacturer URL=http://www.yageo.com/, Military Standard=Not, Packaging=TapeandReel, REACH SVHC=Unknown, RoHSCompliant=true, Termination=SMD/SMT
U1: "Telecom Circuit, 1-Func, CMOS, PQCC32", Manufacturer="NXP Semiconductors", Max Operating Temperature=85°C, Mfr_Name=NXP, Min Operating Temperature=-25°C, Package Body Material=Plastic, Package Code=HVQCCN, Package Shape=Square, Package Style="CHIP CARRIER, HEAT SINK/SLUG, VERY THIN PROFILEMeter", Supplier Part Number 1=568-13922-1-ND, Supply Voltage-Nom=5V, Temperature Grade=OTHER, Category="RF Semiconductors and Devices", ComponentLink1Description=https://datasheet.ciiva.com:443/pdfs/VipMasterIC/IC/PHGL/PHGLS30447/PHGLS30447-1.pdf?src-supplier=IHS+Markit, ComponentLink1URL=https://datasheet.ciiva.com:443/pdfs/VipMasterIC/IC/PHGL/PHGLS30447/PHGLS30447-1.pdf?src-supplier=IHS+Markit, ComponentLink2Description=https://datasheet.ciiva.com/8149/clrc663-8149081.pdf?src-supplier=Avnet, ComponentLink2URL=https://datasheet.ciiva.com/8149/clrc663-8149081.pdf?src-supplier=Avnet, Copyright="Copyright (C) 2023 Ultra Librarian. All rights reserved.", Height - Seated (Max)=1mm, JESD-30 Code=S-PQCC-N32, Length=5mm, Manufacturer Part Number=CLRC66302HN,118, Manufacturer_Part_Number=CLRC66302HN,118, Moisture Sensitivity Level=1, Number of Functions=1, Number of Pins=32, Pricing 1="1=10.72, 10=9.696, 25=8.9308, 100=8.1653, 250=7.655, 500=7.14466, 1000=6.78743 (USD)", Reach SVHC Compliant=Yes, RefDes=RefDes, RoHS=Yes, RoHS Compliant=Yes, Stock 1=15797, Supplier 1=Digi-Key, Surface Mount=Yes, Technology=CMOS, Telecom IC Type="TELECOM CIRCUIT", Terminal Form="No Lead", Terminal Pitch=0.5mm, Terminal Position=QUAD, Type=DEV, Width=5mm
X1: "Parallel - Fundamental Quartz Crystal, 27.12MHz Nom", Manufacturer=IQD, Mfr_Name="IQD Frequency Products", Supplier Part Number=1923-1787-ND, Clock Speed=27.12MHz, ComponentLink1Description=https://www.iqdfrequencyproducts.com:443/products/pn/LFXTAL036075Bulk.pdf?src-supplier=IHS+Markit, ComponentLink1URL=https://www.iqdfrequencyproducts.com:443/products/pn/LFXTAL036075Bulk.pdf?src-supplier=IHS+Markit, Copyright="Copyright (C) 2023 Ultra Librarian. All rights reserved.", Manufacturer Part Number=LFXTAL036075BULK, Manufacturer_Part_Number=LFXTAL036075BULK, Pricing="1=0.5, 10=0.419, 50=0.3772, 100=0.3353, 500=0.31856, 1000=0.26826, 2500=0.25149, 5000=0.24311, 10000=0.23472 (USD)", RefDes=RefDes, RoHS=Yes, RoHS Compliant=Yes, Stock=4877, Supplier=Digi-Key, Type=DEV

## Via types
v1: diameter 17.72, hole 9.84, Top Layer to Bottom Layer, tented both sides, 34 vias
v2: diameter 40, hole 20, Top Layer to Bottom Layer, 2 vias
v3: diameter 40, hole 20, Top Layer to Bottom Layer, tented both sides, 1 vias

## Nets (pads, with @x,y where several pads share a name; then routed paths per layer and width w, separated by ;. In a path a pad name is that pad's centre, name@x,y a point inside that pad or via, vN(x,y) a via of type N, cw(c..) or ccw(c..) an arc to the next point about the centre after c; other vN are vias at no path point)
"AVDD HDR": C8.1 J1.1 U1.9 | length 1420.8
  Top Layer w10: J1.1 v1(455,2050) ; v1(875,2020) 980,2020 1160,1840 1240,1840 1392.5,1992.5 U1.9@1456.1,1992.5 ; C8.1 1443.23,1863.7 1443.23,1925.6 1456.1,1938.47 U1.9@1456.1,1992.5 ; U1.9 U1.9@1456.1,1992.5
  Bottom Layer w10: v1(455,2050) 845,2050 v1(875,2020)
"CLKOUT HDR": J1.4 U1.22 | length 1790.8
  Top Layer w10: J1.4 425.96,1750 495.96,1820 1260,1820 1382.09,1942.09 1382.09,1953.34 1395.83,1967.08 v1(1395.83,1969.17) ; U1.22 1649.53,2129.53 1680,2160 v1(1705,2160) ; v1(1745,1980) v1(1745,2050)
  Bottom Layer w10: v1(1395.83,1969.17) 1720.83,1969.17 1730.19,1978.52 1743.52,1978.52 v1(1745,1980) ; v1(1705,2160) 1745,2120 v1(1745,2050)
"DVDD HDR": C7.1 J1.2 U1.7 | length 1230.3
  Top Layer w10: J1.2 353.52,1946.48 443.52,1946.48 v1(445,1945) ; v1(945,2045) 1032.09,2045 1097.56,1979.53 C7.1 1215.54,1988.99 1215.54,2044.93 1221.4,2050.79 U1.7
  Bottom Layer w10: v1(445,1945) 845,1945 v1(945,2045)
GND: C3.2 C4.2 C6.2 C7.2 C8.2 C9.1 C10.1 C11.1 C15.2 C16.2 C17.2 C18.1 C19.1 C20.1 C21.1 C22.1 C23.2 P1.4 R11.1 U1.16 U1.33 | length 903.2
  Top Layer w10: v1(1220,1875) 1220,1915.47 C7.2 ; C8.2 1370.47,1796.62 1380,1787.09 v1(1380,1785) ; v1(1520,1805) 1535.75,1805 C23.2 1614.25,1844.25 1650,1880 1650,1957 1608.04,1998.96 1593.9,1998.96 1593.9,2020.73 1593.5,2021.13 1593.5,2031.5 U1.33
  Bottom Layer w10: v1(1220,1875) 1310,1785 v1(1380,1785) 1500,1785 v1(1520,1805)
IFSEL0: R11.2 U1.26 | length 179.3
  Top Layer w10: U1.26 1574.21,2218 1616.21,2260 1666.89,2260 1685.47,2241.42 R11.2
IFSEL1: R9.1 U1.27 | length 171.7
  Top Layer w10: U1.27 1554.53,2207.5 1559.21,2212.19 1559.21,2224.21 1610,2275 1633.03,2275 1642.23,2284.2 1642.23,2306.76 R9.1
IRQ: P1.5 R14.2 U1.32 | length 828.7
  Top Layer w10: P1.5 1225,2740.94 R14.2 1225.32,2429.2 1255.8,2429.2 1275,2410 1275,2290 1340,2225 1450.24,2225 1456.1,2219.14 U1.32
MISO: R15.1 U1.30 | length 203.2
  Top Layer w10: R15.1 1425,2345 1495.47,2274.53 U1.30
MOSI: R16.1 U1.28 | length 240
  Top Layer w10: v1(1525,2320) R16.1 ; U1.28 1534.84,2244.84 1584.87,2294.87 v1(1584.87,2295.13)
  Bottom Layer w10: v1(1525,2320) 1550,2320 1573.52,2296.48 1583.52,2296.48 v1(1584.87,2295.13)
NetC1_2: C1.2 R2.1 | length 158.2
  Top Layer w10: C1.2 1875,1539.76 1912.99,1501.77 R2.1
NetC2_1: C2.1 C3.1 C4.1 C5.1 L1.2 R2.2 | length 660.4
  Top Layer w10: C4.1 C2.1 1530.32,1303.94 1530.32,1396.06 C5.1 ; C3.1 C5.1 ; R2.2 1746.93,1400 1642.42,1504.51 L1.2 1607.58,1504.51 1575.08,1472.01 1575.08,1451.65 1526.38,1402.95 C5.1
NetC2_2: C2.2 C5.2 C6.1 R3.1 | length 340.4
  Top Layer w10: C6.1 1539.17,1198.62 1570.08,1229.53 R3.1 1575,1290.75 C2.2 1573.62,1307.87 C5.2
NetC9_2: C9.2 C12.2 C14.2 R4.1 | length 401.2
  Top Layer w10: R4.1 630.86,1285.39 630.86,1364.23 ; C14.2 625,1370.09 630.86,1364.23 ; C12.2 725,1370.09 719.14,1364.23 ; C9.2 775,1308.38 719.14,1364.23 ; 630.86,1364.23 719.14,1364.23
NetC10_2: C10.2 C11.2 C12.1 C14.1 L2.2 R5.2 | length 732.3
  Top Layer w10: C14.1 627.95,1448.62 637.72,1458.39 637.72,1461.34 651.38,1475 715,1475 725,1465 C12.1 833.18,1548.93 860.94,1548.93 R5.2 862.01,1617.01 902.87,1657.87 902.87,1682.37 L2.2 ; C10.2 628.94,1594.68 721.06,1594.68 C11.2 781.38,1598.62 830,1550
NetC13_2: C13.2 R5.1 | length 129.5
  Top Layer w10: R5.1 C13.2
NetC16_1: C16.1 R7.2 X1.1 | length 349.1
  Top Layer w10: R7.2 1928.94,2454.53 1973.62,2409.84 C16.1 2075,2300 X1.1
NetC17_1: C17.1 R8.2 X1.2 | length 412.6
  Top Layer w10: R8.2 1826.57,2100 1923.62,2002.95 C17.1 2067.13,2000 X1.2
NetP1_3: P1.3 R12.2 | length 478.4
  Top Layer w10: P1.3 1125,2640.94 R12.2
NetP1_6: P1.6 R13.2 | length 417.5
  Top Layer w10: P1.6 1325,2740.94 R13.2
NetP1_7: P1.7 R15.2 | length 417.5
  Top Layer w10: P1.7 1425,2740.94 R15.2
NetP1_8: P1.8 R16.2 | length 417.5
  Top Layer w10: P1.8 1525,2740.94 R16.2
NetP1_9: P1.9 R17.2 | length 417.5
  Top Layer w10: P1.9 1625,2740.94 R17.2
NetP1_10: P1.10 R18.2 | length 417.5
  Top Layer w10: P1.10 1725,2740.94 R18.2
NetR3_2: R3.2 R4.2 | length 29309.3
  Top Layer w10: R3.2 1579.92,1170.47 1751.57,998.83 1891.98,998.83 v2(1925,1031.84)
  Top Layer w19.68: R4.2 625.08,1220.47 630,1215.55 v3(630,1155) ; v2(1915,825) 1900,840 370,840 340,810 340,-725 369.49,-754.49 1930.51,-754.49 1960,-725 1960,850 1930.63,879.37 349.37,879.37 300.63,830.63 300.63,-745.63 348.86,-793.86 1951.14,-793.86 1993.54,-751.46 1993.54,876.46 1951.26,918.74 328.74,918.74 261.26,851.26 261.26,-766.26 328.23,-833.23 1971.77,-833.23 2032.91,-772.09 2032.91,897.09 1971.89,958.11 308.11,958.11 221.89,871.89 221.89,-786.89 307.6,-872.6 1992.4,-872.6 2072.28,-792.72 2072.28,917.72 1958.16,1031.84 v2(1925,1031.84)
  Bottom Layer w19.68: v3(630,1155) 630,870 675,825 v2(1915,825)
"NSS / SSEL": R13.1 U1.31 | length 241
  Top Layer w10: R13.1 1328.94,2370.47 1405.8,2293.61 1409.68,2293.61 1475.79,2227.5 U1.31
PVDD: C20.2 R9.2 R10.2 R14.1 U1.25 | length 1175.4
  Top Layer w10: R10.2 1195,2200 1226.42,2231.42 1226.42,2293.47 1226.48,2293.52 1226.48,2318.52 v1(1225,2320) R14.1 ; U1.25 1593.9,2207.5 1619.92,2233.52 1638.52,2233.52 v1(1640,2235) ; R9.2@1709.53,2320 1715,2314.53 v1(1715,2270) 1725,2280 1795,2280 1825,2310 C20.2
  Bottom Layer w10: v1(1225,2320) 1490,2320 1495,2315 1495.5,2315 1553.5,2257 1616.57,2257 1638.57,2235 v1(1640,2235) 1675,2270 v1(1715,2270)
RST: R12.1 U1.21 | length 749.5
  Top Layer w10: R12.1 1128.79,2286.17 1128.79,2256.21 v1(1160,2225) ; U1.21 1670.69,2109.84 v1(1671.87,2111.02)
  Bottom Layer w10: v1(1160,2225) 1364.22,2225 1379.22,2240 1581.34,2240 1587.2,2234.14 1587.2,2152.8 1620.86,2119.14 1662.15,2119.14 1670.28,2111.02 v1(1671.87,2111.02)
RXN: C13.1 R6.1 U1.13 | length 793.1
  Top Layer w10: C13.1 1182.51,1653.12 R6.1 1423.54,1660.63 1437.91,1675 v1(1440,1675) ; v1(1506.77,1896.14) 1508.25,1897.62 1523.58,1897.62 1534.84,1908.88 U1.13
  Bottom Layer w10: v1(1440,1675) 1545,1780 1545,1839.91 1508.25,1876.66 1508.25,1894.67 v1(1506.77,1896.14)
RXP: C1.1 R1.1 U1.12 | length 834.3
  Top Layer w10: v1(1475,1860) 1475,1910 1515.16,1950.16 U1.12 ; v1(1703.86,1810) 1824.37,1810 R1.1 1825,1730 1875,1680 C1.1
  Bottom Layer w10: v1(1475,1860) 1475,1884.77 1471.48,1888.29 1471.48,1909.14 1477.33,1915 1527.22,1915 1632.22,1810 v1(1703.86,1810)
SCK: R17.1 U1.29 | length 221.8
  Top Layer w10: U1.29 1515.16,2260.63 1610.31,2355.79 1610.31,2359.72 1621.06,2370.47 R17.1
"SCL HDR": J1.3 U1.23 | length 1924.9
  Top Layer w10: J1.3 643.47,1850 859.32,2065.86 1035.27,2065.86 1041.13,2060 v1(1135,2060) ; U1.23 1644.71,2149.21 1675.5,2180 v1(1785,2180)
  Bottom Layer w10: v1(1135,2060) 1195.86,2120.86 1462.61,2120.86 1563.46,2020 1769.14,2020 1790,2040.86 1790,2106.88 1785,2111.88 v1(1785,2180)
SDA: R18.1 U1.24 | length 478.1
  Top Layer w10: U1.24 1632.5,2168.9 1650.77,2187.17 1650.77,2200.77 v1(1652.25,2202.25) ; v1(1670,2405) 1671.48,2403.52 1688.01,2403.52 1721.06,2370.47 R18.1
  Bottom Layer w10: v1(1652.25,2202.25) 1664.5,2190 1729.5,2190 1770.86,2231.36 1770.86,2304.14 v1(1670,2405)
TVDD: C21.2 C22.2 L3.1 U1.18 | length 1868.2
  Top Layer w10: L3.1 375,2499.25 C21.2 407.65,2378.1 407.65,2304.95 C22.2 450.16,2300 650.16,2100 v1(1260,2100) ; U1.18 1684.21,2050.79 1715,2020 v1(1715,1990)
  Bottom Layer w10: v1(1260,2100) 1325,2035 1491.03,2035 1536.03,1990 v1(1715,1990)
"TVDD JUMP": C15.1 C18.2 L3.2 P1.1 | length 710.4
  Top Layer w10: C18.2 285.33,2601.08 379.43,2601.08 442.72,2537.8 C15.1 625,2690.94 P1.1
TX1: L1.1 U1.17 | length 424.9
  Top Layer w10: U1.17 1679.14,2031.1 1685,2025.24 1685,1747.99 1632.5,1695.49 L1.1
TX2: L2.1 U1.15 | length 886.8
  Top Layer w10: L2.1 935,1905.49 v1(935,1980) ; U1.15 1574.21,1975.79 1613.52,1936.48 1618.52,1936.48 v1(1620,1935)
  Bottom Layer w10: v1(935,1980) 985,1930 1298.96,1930 1303.96,1935 v1(1620,1935)
VDD: C19.2 P1.2 R10.1 U1.8 | length 1278.4
  Top Layer w10: P1.2 975,2690.94 C19.2 963.19,2401.18 929.54,2367.53 929.54,2244.87 970.47,2203.94 970.47,2159.72 980,2150.19 v1(980,2150) ; v1(1325,2014.14) 1325,2016.23 1338.19,2029.42 1338.19,2031.1 U1.8
  Bottom Layer w10: v1(980,2150) 1115.86,2014.14 v1(1325,2014.14)
VMID: C23.1 J1.5 R1.2 R6.2 U1.14 | length 1808.4
  Top Layer w10: J1.5 475,1775 1134.45,1775 1162.94,1746.5 1167.87,1746.5 R6.2 1474.37,1739.37 1495,1760 1495,1869.89 1500.86,1875.75 C23.1 v1(1575,1911.14) 1575,1925 1575,1949.11 1554.53,1969.58 U1.14 ; v1@1738.52,1911.48 v1(1740,1910) 1760.63,1889.37 R1.2
  Bottom Layer w10: v1(1575,1911.14) 1575.57,1910.57 1737.62,1910.57 v1@1738.52,1911.48
XTAL1: R8.1 U1.19 | length 118.8
  Top Layer w10: U1.19 1670.47,2070.47 1703.87,2070.47 1709.72,2076.33 1709.72,2089.25 R8.1
XTAL2: R7.1 U1.20 | length 532
  Top Layer w10: U1.20 1686.87,2090.16 1692.72,2096.02 1692.72,2124.66 1699.75,2131.69 1806.69,2131.69 1831.51,2156.51 1831.51,2254.59 1925,2348.07 R7.1
pads on no net: U1.1 U1.2 U1.3 U1.4 U1.5 U1.6 U1.10 U1.11

## Polygon pours and split planes (outlines as drawn)
GND on Top Layer "GND_L01_P000" (solid, pour order 0): 75,2900 75,1075 2200,1075 2200,2900

## Silkscreen, mask and mechanical layers (free items; w line width, h text height)
Top Overlay:
  text "TVDD" at 780,2765 h25 r180
  text "VDD" at 885,2765 h25 r180
  text "RST" at 985,2765 h25 r180
  text "GND" at 1080,2765 h25 r180
  text "IRQ" at 1185,2765 h25 r180
  text "NSS" at 1290,2760 h25 r180
  text "MISO" at 1405,2760 h25 r180
  text "MOSI" at 1525,2760 h25 r180
  text "SDA" at 1625,2760 h25 r180
  text "SCK" at 1720,2760 h25 r180
  text "AVDD" at 425,2115 h25 r270
  text "DVDD" at 425,2000 h25 r270
  text "SCL2" at 425,1890 h25 r270
  text "CLK" at 425,1780 h25 r270
  text "VMID" at 425,1685 h25 r270

## Text inside footprints (layer, text, board x,y; h text height)
C15: Top Overlay "+" at 644.68,2632.28 h39.37 r90
U1: Mechanical 13 "*" at 1432,2153.74 h39.37; Top Overlay "*" at 1370,2155 h39.37
X1: Mechanical 13 "*" at 2154,2368.94 h39.37 r270; Top Overlay "*" at 2155,2425 h39.37 r270